# Altium PCB BMS_PCB.PcbDoc
Units mm, origin at the board's own origin, x right, y up, seen from the top; angles counter-clockwise.
Board outline 159.77 x 122.43 mm, 4 copper layers (Top Layer, HV_GND, LV_GND, Bottom Layer), stack 1.762 mm thick; 109 components, 72 nets, 406 pads, 0 vias.
Unrouted connection lines stored in the file: 182.
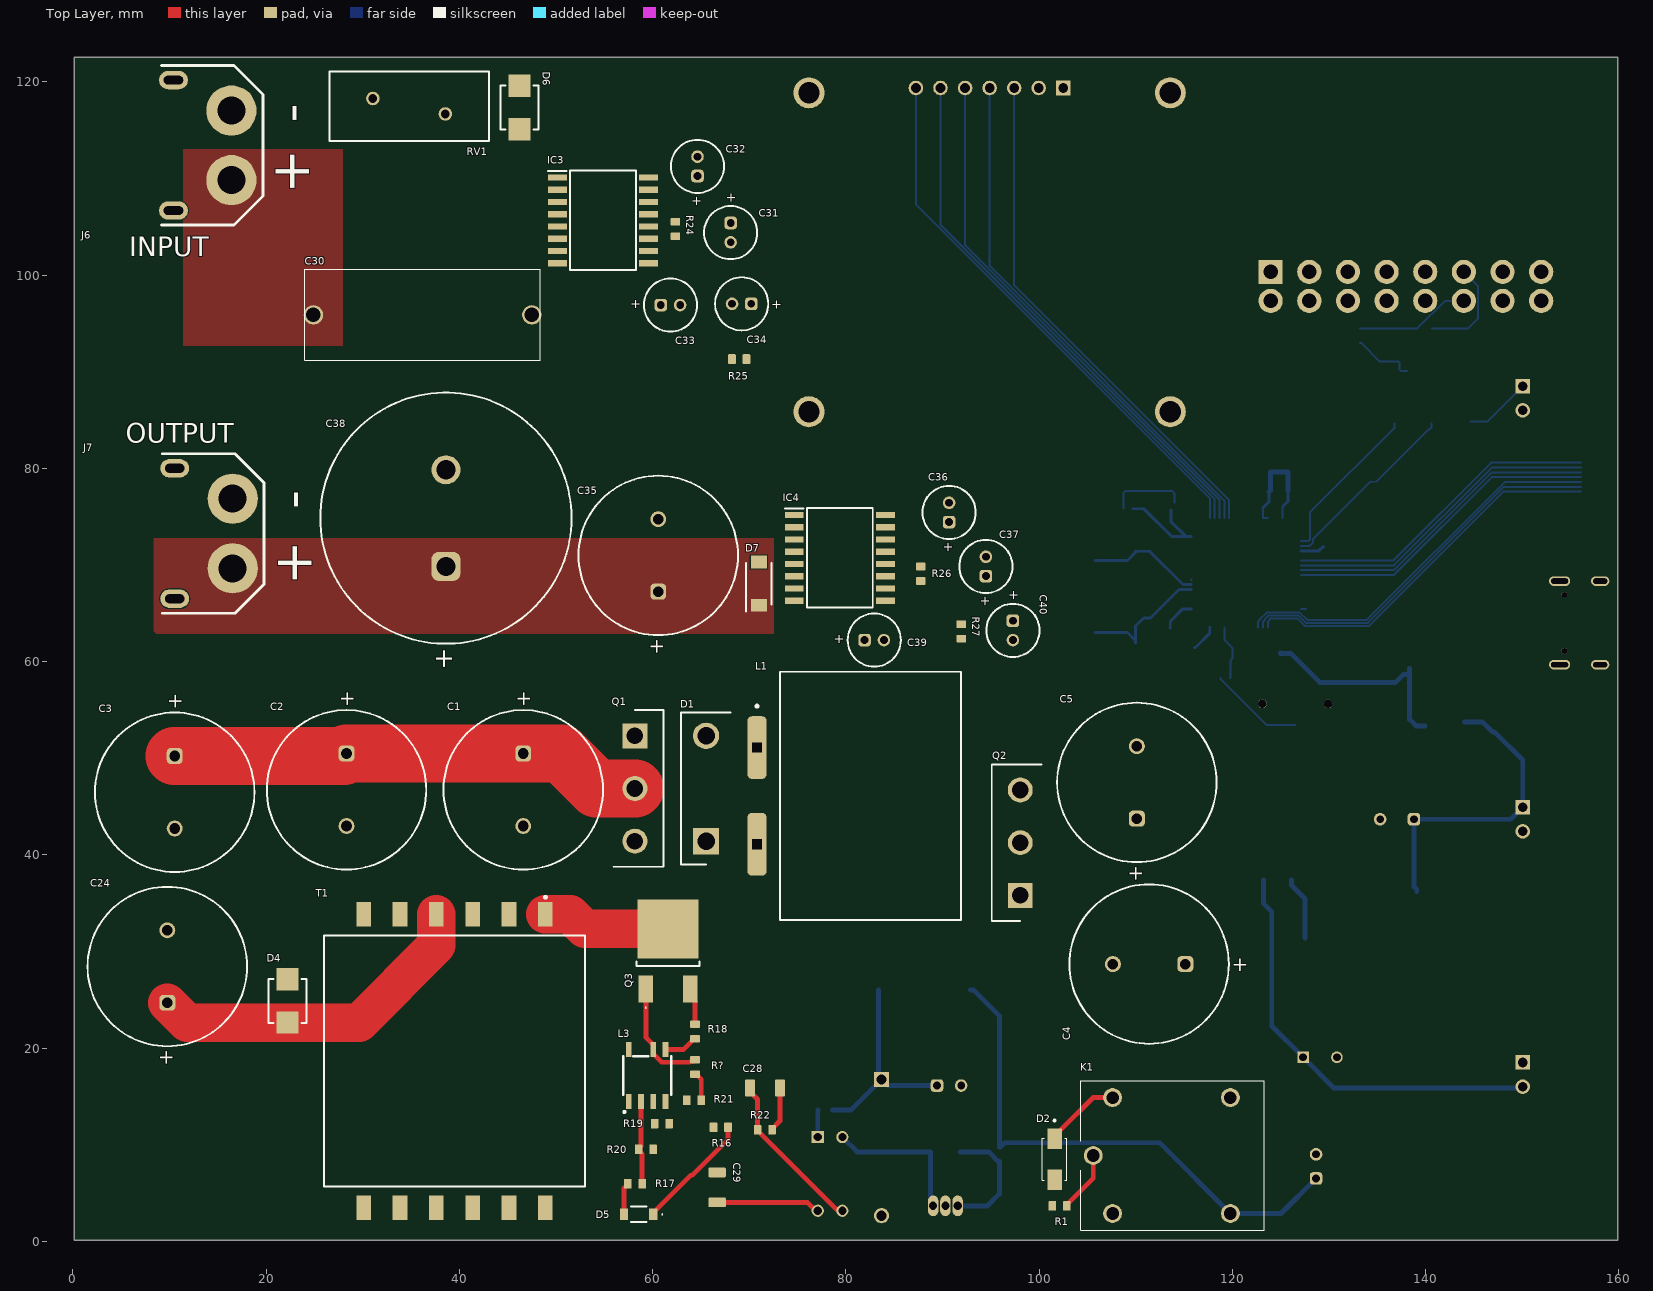
[diagram p0: Top Layer view]
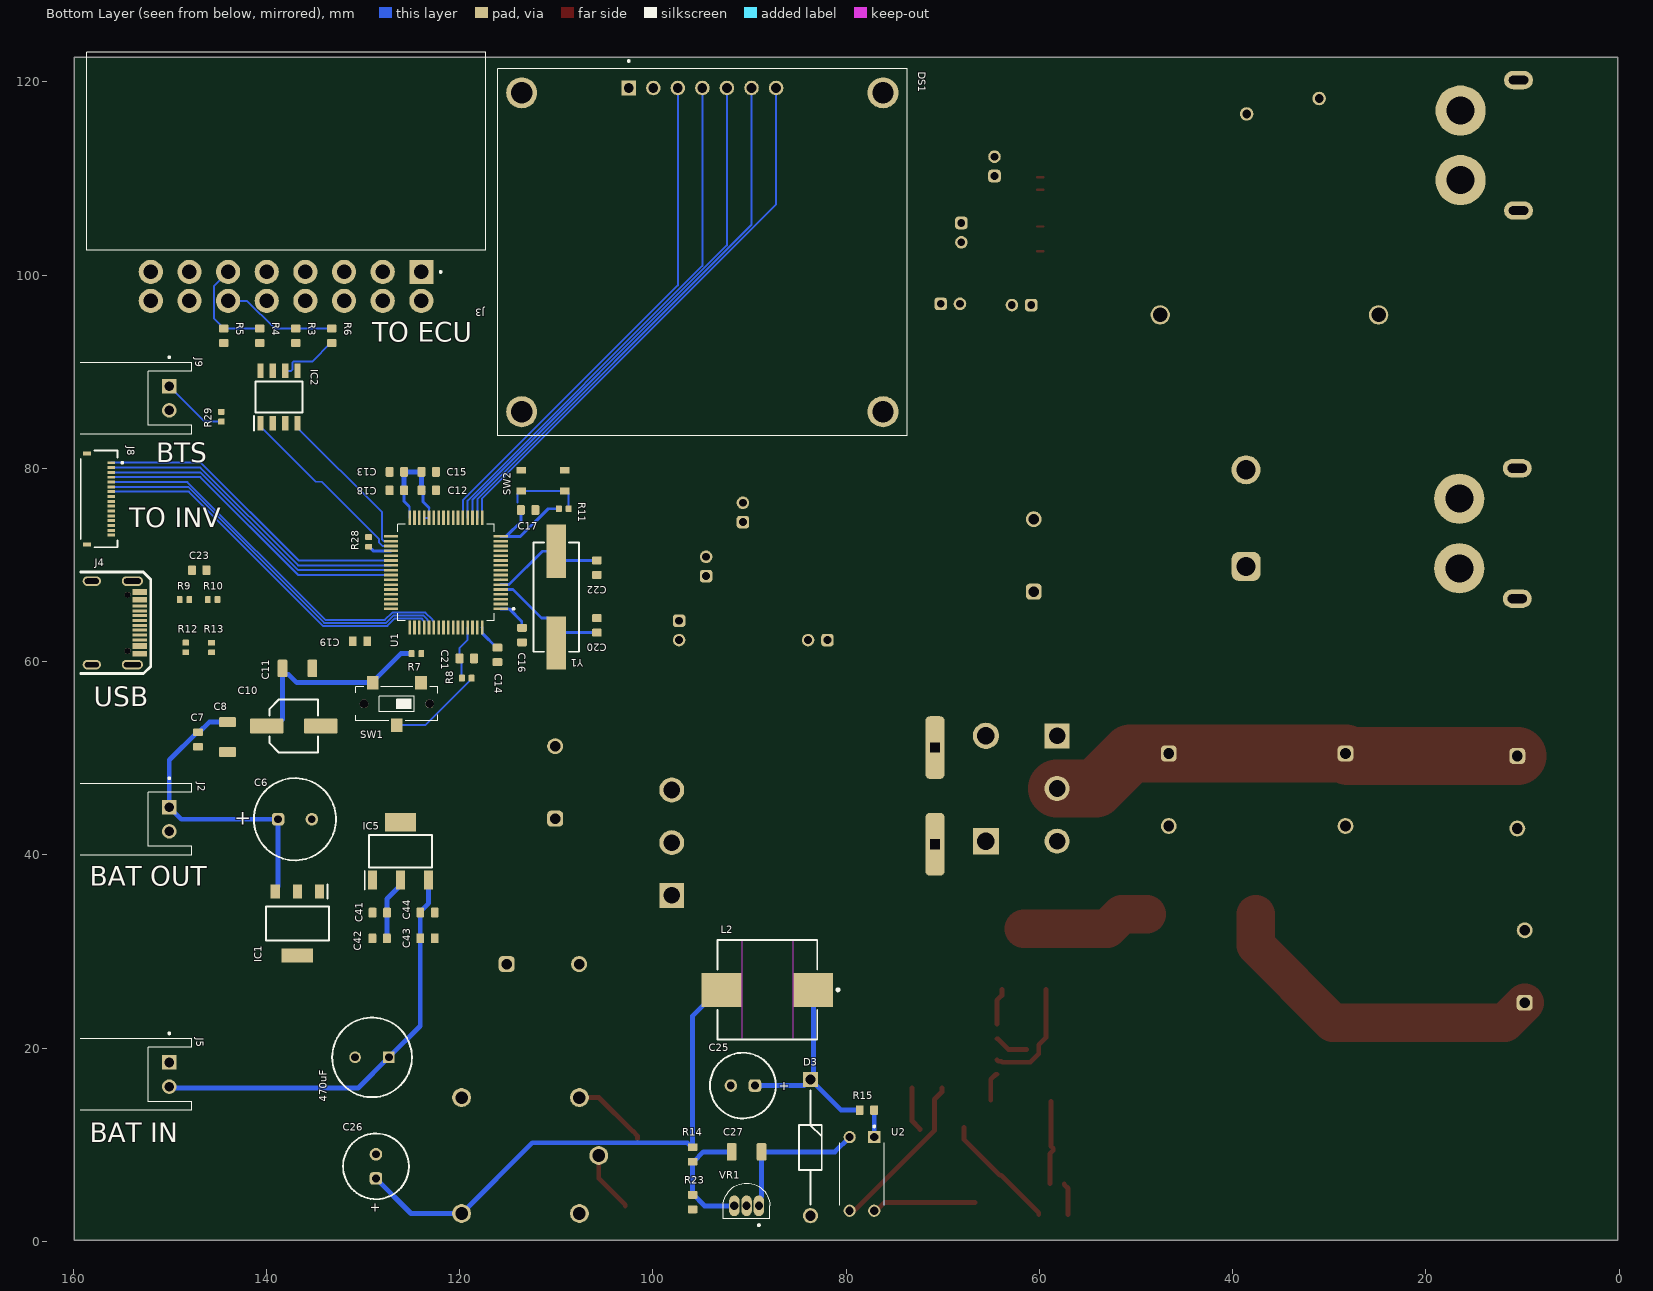
[diagram p1: Bottom Layer view, seen from below]
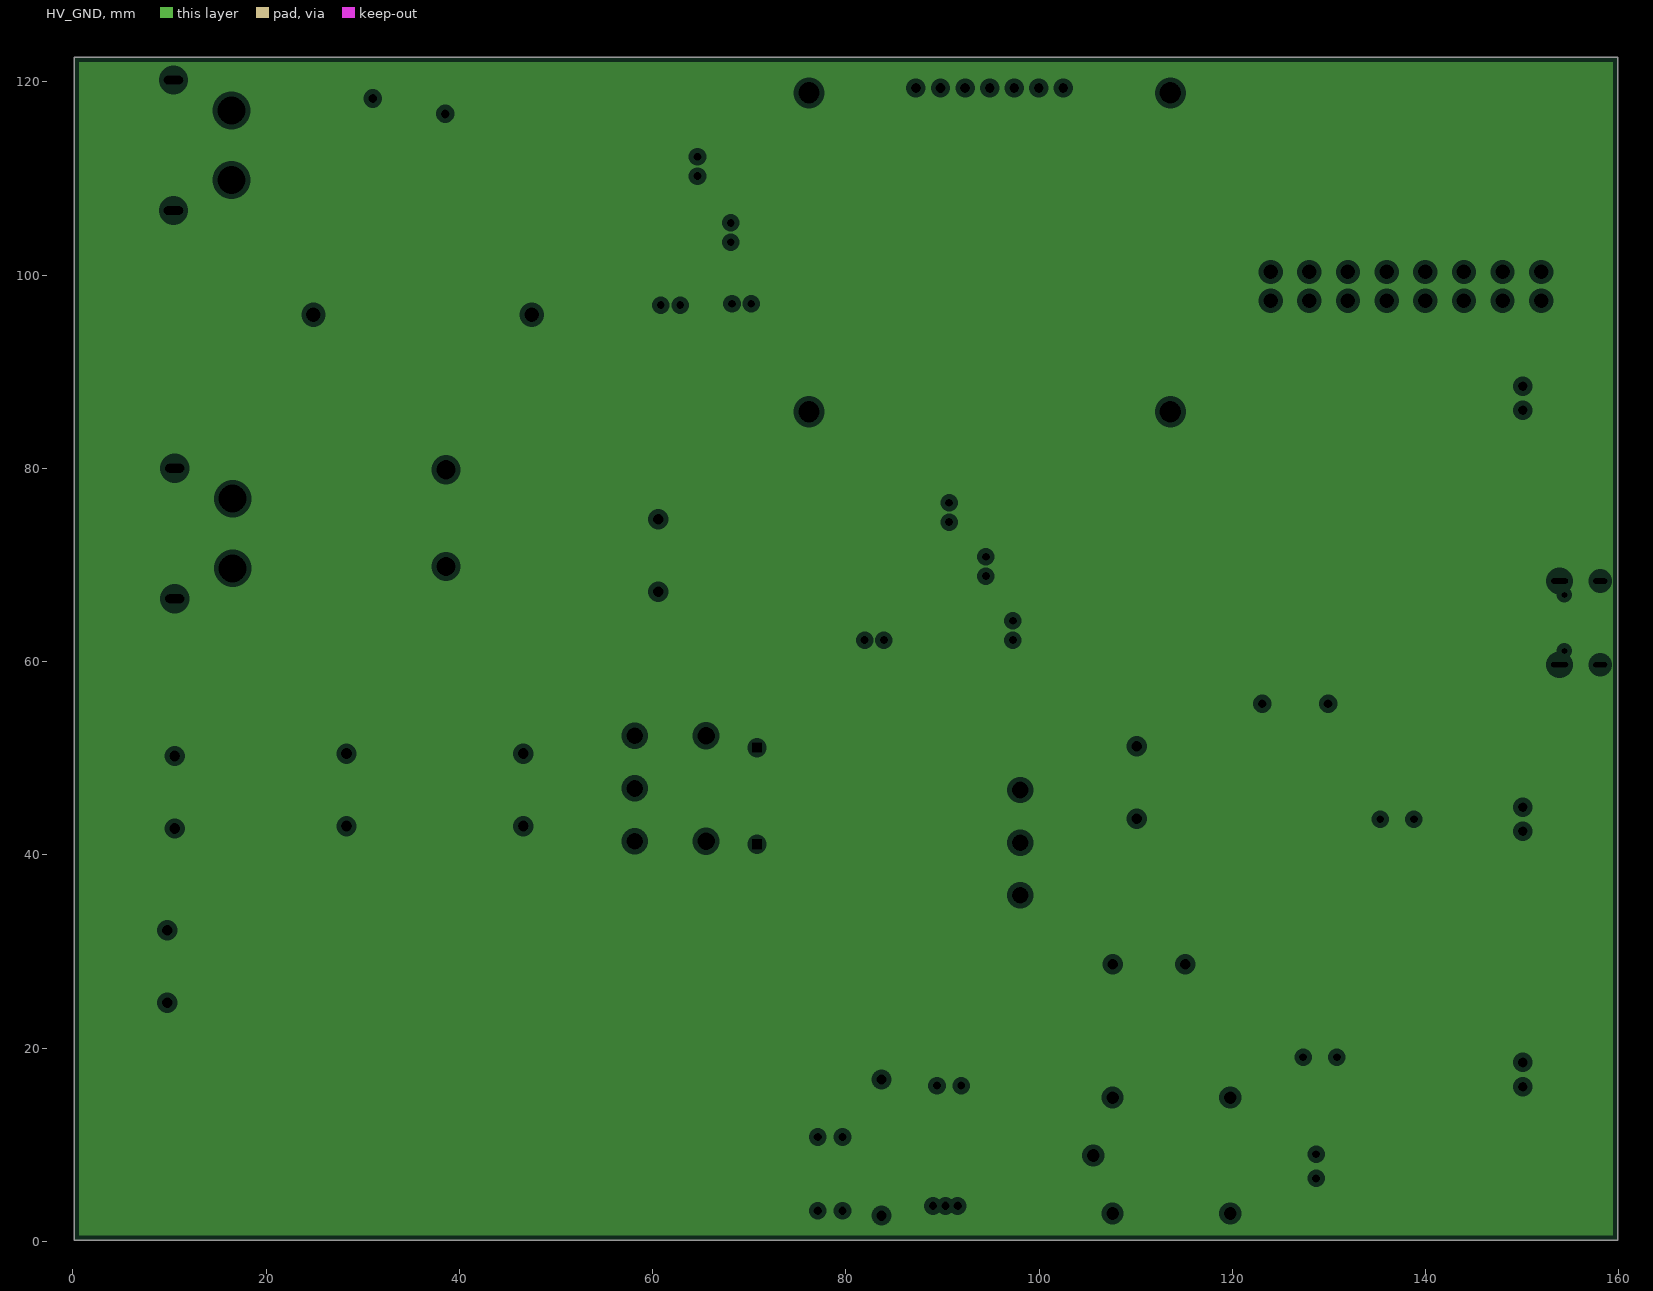
[diagram p2: HV_GND, clearances drawn from the general rule]
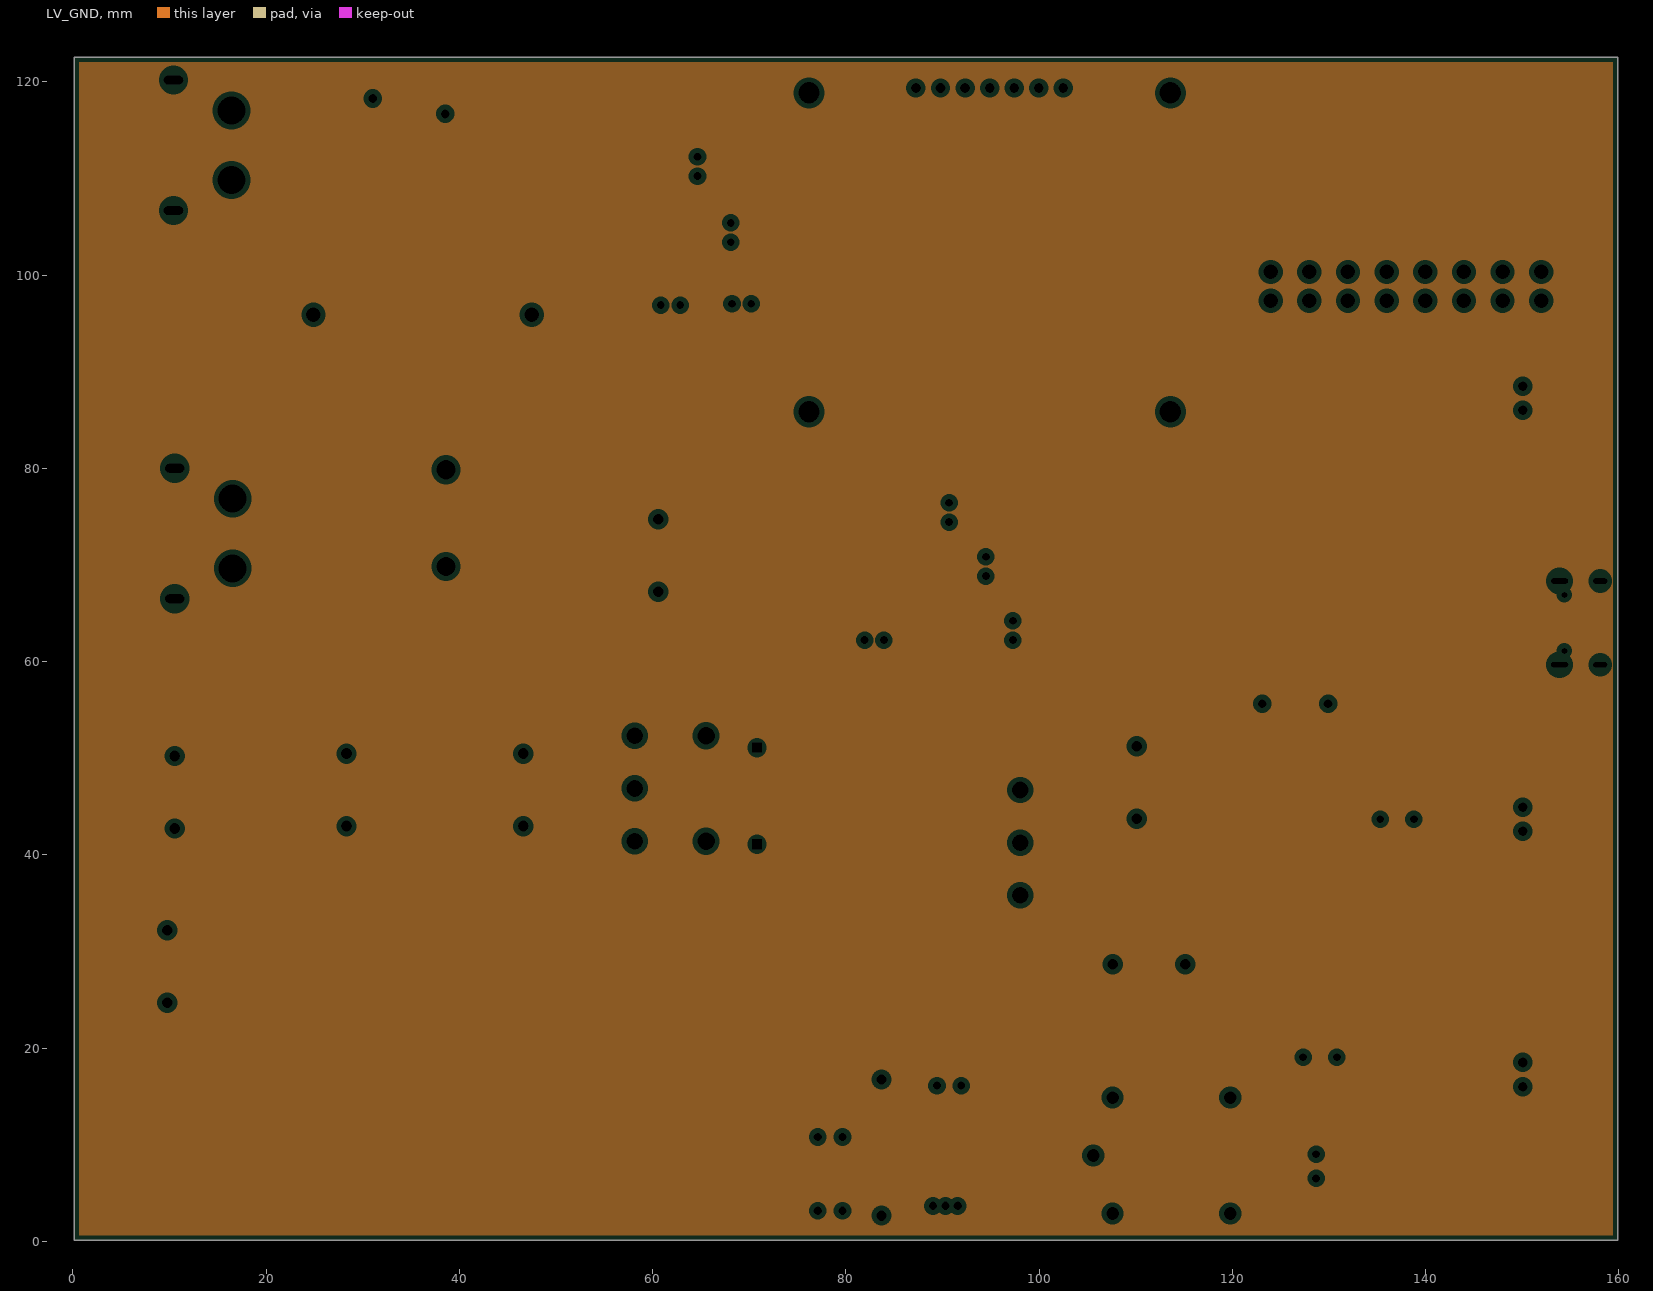
[diagram p3: LV_GND, clearances drawn from the general rule]

## Layer stack, top to bottom
Top Solder: solder mask 0.0102, Solder Resist, Dk 3.5
Top Layer: signal copper 0.105
Dielectric 2: prepreg 0.0711, PP-006, Dk 4.29
HV_GND: plane copper 0.105
Dielectric 1: dielectric 1.2, FR-4, Dk 4.8
LV_GND: plane copper 0.105
Dielectric 3: prepreg 0.0711, PP-006, Dk 4.29
Bottom Layer: signal copper 0.105
Bottom Solder: solder mask 0.0102, Solder Resist, Dk 3.5

## Board outline
0.127,0.127 0.127,122.555 159.893,122.555 159.893,0.127

## Design rules (kind name [scope] priority, off if disabled: settings)
Clearance [All] p1: gap=0.1 ignorepadtopadclearanceinfootprint=FALSE
ComponentClearance [All] p1: gap=0 collisioncheckmode=3 verticalgap=0 showdistances=FALSE
DiffPairsRouting [All] p1: maxlimit=0.254 minlimit=0.254 mostfreqgap=0.254 toplayer_minwidth=0.381 toplayer_maxwidth=0.381 toplayer_prefwidth=0.381 bottomlayer_minwidth=0.381 bottomlayer_maxwidth=0.381 bottomlayer_prefwidth=0.381 maxuncoupledlength=12.7
Height [All] p1: minheight=0 maxheight=50 prefheight=30
HoleSize [All] p1: absolutevalues=TRUE maxlimit=10 minlimit=0.025 maxpercent=80.000 minpercent=20.000
PlaneClearance [All] p1: clearance=0.508
PlaneConnect [All] p1: planeconnectstyle=Relief reliefexpansion=5 reliefentries=4 reliefconductorwidth=5 reliefairgap=0.2
PolygonConnect [All] p1: connectstyle=Relief reliefconductorwidth=5 reliefentries=4 polygonreliefangle="90 Angle" airgapwidth=0.2
RoutingVias [All] p1: holewidth=0.711 width=1.27 viastyle="Through Hole" minholewidth=0.711 minwidth=1.27 maxholewidth=0.711 maxwidth=1.27
SilkToSilkClearance [All] p1: silktosilkclearance=0.1
SolderMaskExpansion [All] p1: expansion=0.102 istentingtop=FALSE
UnRoutedNet [All] p1: checkbadconnections=TRUE
Width [All] p1: maxlimit=15 minlimit=0.2 preferedwidth=10 minimp=50.000000 maximp=50.000000 favimp=50.000000
22 further rules are at their usual default settings.

## Classes and differential pairs
component class "Switch mode power supply": 470uF C24 C25 C26 C27 C28 C29 D3 D4 D5 J5 L2 L3 Q3 R14 R15 R16 R17 R18 R19 R20 R21 R22 R23 R? T1 U2 VR1
component class "HV power supply": C1 C2 C3 C4 C5 C6 C7 C8 C10 C11 D1 D2 IC1 J2 J8 K1 L1 Q1 Q2 R1
component class "Current sensors": C30 C31 C32 C33 C34 C35 C36 C37 C38 C39 C40 C41 C42 C43 C44 D6 D7 IC3 IC4 IC5 J6 J7 R24 R25 R26 R27 RV1
component class CPU: C12 C13 C14 C15 C16 C17 C18 C19 C20 C21 C22 C23 DS1 IC2 J3 J4 J9 R3 R4 R5 R6 R7 R8 R9 R10 R11 R12 R13 R28 R29 SW1 SW2 U1 Y1
differential pair USB: +USB_P -USB_N

## Components (designator, comment, footprint, x,y, rotation, side; value= is the part's Value field where it differs from the comment)
470uF "UVR1C471MPD" CAPPRD350W60D825H1300 127.31,19.05 r0 bottom
C1 "100µF" WCAP-AT1H_D16H35.5 46.609,46.736 r90 top
C2 "100µF" WCAP-AT1H_D16H35.5 28.321,46.736 r90 top
C3 "100µF" WCAP-AT1H_D16H35.5 10.541,46.482 r90 top
C4 "100µF" WCAP-AT1H_D16H35.5 111.379,28.702 r0 top
C5 "100µF" WCAP-AT1H_D16H35.5 110.109,47.498 r270 top
C6 "680uF" WCAP-ATG8_D8H16 137.033,43.688 r0 bottom
C7 "0.1uF" CAP_0603 147.066,51.943 r270 bottom
C8 "10uF" CAP_1206 144.018,52.197 r270 bottom
C10 "220uF" CAP-EL-NP-5MM 137.16,53.34 r180 bottom
C11 "20uF" CAP_1206 136.779,59.309 r180 bottom
C12 "1uF" CAP_0603 123.19,77.724 r180 bottom
C13 "10nF" CAP_0603 126.492,79.629 r0 bottom
C14 "10nF" CAP_0603 116.078,60.706 r270 bottom
C15 "10nF" CAP_0603 123.19,79.629 r180 bottom
C16 "10nF" CAP_0603 113.538,62.738 r270 bottom
C17 "10nF" CAP_0603 112.903,75.692 r180 bottom
C18 "10nF" CAP_0603 126.492,77.724 r0 bottom
C19 "10nF" CAP_0603 130.302,62.103 r0 bottom
C20 "26pF" CAP_0603 105.791,63.754 r90 bottom
C21 "1uF" CAP_0603 119.253,60.325 r180 bottom
C22 "26pF" CAP_0603 105.791,69.723 r270 bottom
C23 "100 nF" CAP_0603 146.939,69.469 r180 bottom
C24 "100µF" WCAP-AT1H_D16H35.5 9.779,28.448 r270 top
C25 "220uF" WCAP-ATG8_D6.3H11 90.678,16.129 r180 bottom
C26 "220uF" WCAP-ATG8_D6.3H11 128.651,7.767 r270 bottom
C27 "100nF" CAP_1206 90.297,9.271 r180 bottom
C28 "0.047uF" CAP_1206 71.628,15.875 r0 top
C29 "4.7uF" CAP_1206 66.675,5.588 r270 top
C30 "fuse holder" 696108003002 36.195,95.885 r0 top
C31 "100uF" WCAP-ATG8_D5H11 68.072,104.394 r90 top
C32 "100uF" WCAP-ATG8_D5H11 64.643,111.252 r270 top
C33 "100uF" WCAP-ATG8_D5H11 61.849,96.901 r180 top
C34 "100uF" WCAP-ATG8_D5H11 69.215,97.028 r0 top
C35 "100µF" WCAP-AT1H_D16H35.5 60.579,70.993 r270 top
C36 "100uF" WCAP-ATG8_D5H11 90.678,75.438 r270 top
C37 "100uF" WCAP-ATG8_D5H11 94.488,69.85 r270 top
C38 "220µF" WCAP-AIE8_D25H40 38.608,74.85 r270 top
C39 "100uF" WCAP-ATG8_D5H11 82.931,62.23 r180 top
C40 "100uF" WCAP-ATG8_D5H11 97.282,63.23 r90 top
C41 "10uF" CAP_0603 128.258,34.036 r180 bottom
C42 "100nF" CAP_0603 128.27,31.369 r180 bottom
C43 "10uF" CAP_0603 123.317,31.369 r180 bottom
C44 "100nF" CAP_0603 123.317,34.036 r180 bottom
D1 "STTH60RQ06WY" TO1090P515X1560X2445-2P 65.532,41.424 r90 top
D2 "SS14" DIOM4325X250N 101.6,8.509 r270 top
D3 "BA159" DIOAD1405W86L465D235 83.693,16.764 r270 bottom
D4 "600W, 5VDC" WE-TVSP_DO-214AA_Bidirectional 22.225,24.892 r90 top
D5 "RF071M2S" RF071M2S 58.547,2.794 r270 top
D6 "600W, 5VDC" WE-TVSP_DO-214AA_Bidirectional 46.228,117.348 r90 top
D7 "AES2HF-HF" SODFL5226X110N 70.993,68.072 r90 top
DS1 "AOM12864A0-1.54WW-ANO" LCD_AOM12864A0-1.54WW-ANO 94.869,102.362 r180 bottom
IC1 "AMS1117-3.3" SOT229P700X180-4N 136.779,32.893 r270 bottom
IC2 "TJA1050T_CM,118" SOIC127P600X175-8N 138.684,87.376 r90 bottom
IC3 "ACS37002KMABTR-050B5-00" SOIC127P1030X265-16N 54.864,105.664 r0 top
IC4 "ACS37002KMABTR-050B5-00" SOIC127P1030X265-16N 79.375,70.739 r0 top
IC5 "AMS1117-5.0" SOT290P700X180-4N 126.111,40.386 r90 bottom
J2 "12V battery" JST_S2B-XH-A(LF)(SN) 155.739,43.688 r270 bottom
J3 "C-OBD-II-16M" COMTECH_C-OBD-II-16M 123.954,100.33 r0 bottom
J4 "TYPE-C-31-M-12" TYPE-C-31-M-12 155.956,64.008 r270 bottom
J5 "12V battery" JST_S2B-XH-A(LF)(SN) 155.739,17.272 r270 bottom
J6 "400VDC_PV" XT60PW-F 13.414,113.43 r90 top
J7 "400VDC_PV" XT60PW-F 13.541,73.26 r90 top
J8 "FFC2B28-16-G" GCT_FFC2B28-16-G 157.302,76.835 r270 bottom
J9 "S2B-XH-A(LF)(SN)" JST_S2B-XH-A(LF)(SN) 155.739,87.249 r270 bottom
K1 "PR13-12V-450-1C" RELAY_PR13-12V-450-1C 113.792,8.89 r0 top
L1 "1µH" WE-HCFT_2504_7443762504010 82.55,46.101 r270 top
L2 "1 μH" WE-LHMI_1040 88.138,26.035 r0 bottom
L3 "UCC28740DR" D(R-PDSO-G7) 59.436,17.178 r0 top
Q1 "SCT3030ALGC11" TO545P515X1600X2535-3P 58.166,52.324 r270 top
Q2 "SCT3030ALGC11" TO545P515X1600X2535-3P 98.044,35.814 r90 top
Q3 "STD13NM60ND" STD13NM60ND 61.595,30.353 r0 top
R1 "10K" RES_0603 102.108,3.683 r0 top
R3 "60" RES_0603 136.948,93.726 r90 bottom
R4 "60" RES_0603 140.674,93.726 r90 bottom
R5 "0" RES_0603 144.399,93.726 r270 bottom
R6 "0" RES_0603 133.223,93.726 r270 bottom
R7 "4.7K" RES_0402 124.46,60.833 r0 bottom
R8 "10K" RES_0402 119.253,58.293 r0 bottom
R9 "20K" RES_0402 148.463,66.421 r180 bottom
R10 "10K" RES_0402 145.55,66.421 r180 bottom
R11 "10K" RES_0402 109.22,75.819 r0 bottom
R12 "5K1" RES_0402 148.336,61.468 r270 bottom
R13 "5K1" RES_0402 145.669,61.46 r270 bottom
R14 "7.5K" RES_0603 95.885,9.005 r90 bottom
R15 "820" RES_0603 77.851,13.589 r0 bottom
R16 "154" RES_0603 67.056,11.811 r0 top
R17 "226K" RES_0603 58.166,5.969 r180 top
R18 "1.27K" RES_0603 64.389,21.717 r90 top
R19 "22K" RES_0603 60.96,12.192 r180 top
R20 "27.4K" RES_0603 59.309,9.525 r180 top
R21 "0.82" RES_0603 64.274,14.605 r0 top
R22 "100K" RES_0603 71.616,11.557 r0 top
R23 "2K" RES_0603 95.885,4.064 r90 bottom
R24 "R0603" RES_0603 62.357,104.775 r270 top
R25 "R0603" RES_0603 68.961,91.313 r180 top
R26 "R0603" RES_0603 87.757,69.088 r270 top
R27 "R0603" RES_0603 91.948,63.119 r270 top
R28 "4.7K" RES_0402 129.413,72.39 r270 bottom
R29 "10K" RES_0402 144.653,85.344 r90 bottom
R? "10k" RES_0603 64.389,18.046 r270 top (schematic designator R30)
RV1 "320 VAC, 418 VDC" D16.5W7.2H20.5P1.6 34.798,117.475 r180 top
SW1 "CL-SB-12B-01T" CL-SB-12B-01T 126.492,55.626 r0 bottom
SW2 "Tactile Switch" PTS815 111.379,78.74 r0 bottom
T1 "100-400Vin, Uo1 = 15V/3A" WE-FB_EFD25 39.497,18.669 r270 top
U1 "STM32G474RET6" QFP50P1200X1200X160-64N 121.412,69.215 r0 bottom
U2 "PC817X3NSZ1B" DIP762W50P254L495H455Q4 78.359,6.985 r270 bottom
VR1 "TL431ILP" VREG_TL431ILP 90.297,3.683 r180 bottom
Y1 "20Mhz" WE-XTAL_HC49/4HSMX 109.982,66.675 r90 bottom

## Footprints (in the part's own frame and the unit in brackets; to place one, negate y for a bottom-side part, rotate by r counter-clockwise, add the part's x,y. Pads: shape width x height; smd on the part's side, far side on the other; paste and mask are expansions set on the pad)
696108003002 [mm] "FUSEHOLDER BLOCKS - PCB - CLIP COVER - THT - WR-FSH"
  round 2 hole 1.5: 1(-11.3,0) 2(11.3,0)
  silkscreen extent -12.2,-4.7 12.2,4.7, body extent -12.2,-4.7 12.2,4.7, height 23.72
CAP-EL-NP-5MM [mm]
  rrect25% 3.5x1.6 smd: 1(-2.8,0) 2(2.8,0)
  silkscreen extent -2.5,-2.75 2.5,2.75, body extent -2.65,-2.75 2.65,2.75, height 6.1
CAP_0603 [mm]
  rrect25% 0.8x1 smd: 1(-0.75,0) 2(0.75,0)
  body extent -0.8,-0.4 0.8,0.4, height 0.51
CAP_1206 [mm]
  rrect25% 1x1.8 smd: 1(-1.55,0) 2(1.55,0)
  body extent -1.6,-0.8 1.6,0.8, height 0.94
CAPPRD350W60D825H1300 [mm]
  rect 1.2x1.2 hole 0.8: 1(0,0)
  round 1.2 hole 0.8: 2(3.5,0)
  silkscreen extent -2.38,-4.12 5.87,4.12, body extent -2.49,-4.25 6,4.25, height 13
CL-SB-12B-01T [mm]
  rect 1.2x1.4 smd: 1(-2.5,-2.2) 3(2.5,-2.2) C(0,2.2)
  round 0.9 hole 0.9 unplated: ""(-3.4,0) ""(3.4,0)
  silkscreen extent -4.25,-1.8 4.25,1.75, body extent -4.25,-2.5 4.25,2.5, height 5.5
COMTECH_C-OBD-II-16M [mm]
  rect 2.5x2.5 / inner round 2.5 / far side rect 2.5x2.5 hole 1.5: 1(0,0)
  round 2.5 hole 1.5: 2(4,0) 3(8,0) 4(12,0) 5(16,0) 6(20,0) 7(24,0) 8(28,0) 9(0,3) 10(4,3) 11(8,3) 12(12,3) 13(16,3) 14(20,3) 15(24,3) 16(28,3)
  silkscreen extent -6.65,-22.75 34.65,0.1, body extent -6.65,-22.75 34.65,3.4, height 16.1
D16.5W7.2H20.5P1.6 [mm] "Disk Varistor, Diameter 16.5mm, Width 7.2mm"
  round 1.4 hole 0.9: 1(-3.75,0.8) 2(3.75,-0.8)
  silkscreen extent -8.25,-3.6 8.25,3.6, body extent -7.5,-2.4 7.5,2.4, height 17.7
D(R-PDSO-G7) [mm]
  rect 0.6x1.55 smd: 1(-1.905,-2.7) 2(-0.635,-2.7) 3(0.635,-2.7) 4(1.905,-2.7) 5(1.905,2.7) 6(0.635,2.7) 7(-1.905,2.7)
  silkscreen extent -2.5,-3.86 2.5,2, body extent -2.45,-3.08 2.45,2.94, height 1.63
DIOAD1405W86L465D235 [mm]
  rect 1.575x1.575 hole 1.05: 1(0,0)
  round 1.575 hole 1.05: 2(14.1,0)
  silkscreen extent 1.14,-1.17 12.96,1.17, body extent -0.43,-1.34 14.48,1.34, height 2.7
DIOM4325X250N [mm]
  rect 2.12x1.5 smd: A(2.115,0) C(-2.115,0)
  silkscreen extent -4.1,-1.28 2.16,1.28, body extent -2.57,-1.28 2.57,1.28, height 2.5
DIP762W50P254L495H455Q4 [mm]
  rect 1.26x1.26 / inner round 1.26 / far side rect 1.26x1.26 hole 0.84: 1(-3.81,1.27)
  round 1.26 hole 0.84: 2(-3.81,-1.27) 3(3.81,-1.27) 4(3.81,1.27)
  silkscreen extent -5.01,-2.3 3.25,2.3, body extent -3.94,-2.3 3.94,2.3, height 4.55
GCT_FFC2B28-16-G [mm]
  rect 0.3x0.8 smd: 1(-3.75,1.25) 2(-3.25,1.25) 3(-2.75,1.25) 4(-2.25,1.25) 5(-1.75,1.25) 6(-1.25,1.25) 7(-0.75,1.25) 8(-0.25,1.25) 9(0.25,1.25) 10(0.75,1.25) 11(1.25,1.25) 12(1.75,1.25) 13(2.25,1.25) 14(2.75,1.25) 15(3.25,1.25) 16(3.75,1.25)
  rect 0.4x0.8 smd: S1(-4.7,-1.25) S2(4.7,-1.25)
  silkscreen extent -5,-1.9 5,2.5, body extent -5,-1.9 5,1.9, height 1.1
JST_S2B-XH-A(LF)(SN) [mm]
  rect 1.508x1.508 / inner round 1.508 / far side rect 1.508x1.508 hole 1: 1(-1.25,5.7)
  round 1.508 hole 1: 2(1.25,5.7)
  silkscreen extent -4.35,-3.5 3.7,8, body extent -3.7,-3.5 3.7,8, height 6.1
LCD_AOM12864A0-1.54WW-ANO [mm]
  rect 1.508x1.508 / inner round 1.508 / far side rect 1.508x1.508 hole 1: 1(-7.62,17)
  round 1.508 hole 1: 2(-5.08,17) 3(-2.54,17) 4(0,17) 5(2.54,17) 6(5.08,17) 7(7.62,17)
  round 3.216 hole 2.2: P1(-18.7,16.5) P2(18.7,16.5) P3(-18.7,-16.5) P4(18.7,-16.5)
  silkscreen extent -21.2,-19 21.2,19.89, body extent -21.2,-19 21.2,19, height 5.5
PTS815 [mm]
  rrect10% 1x0.7 smd mask+0: 1(-2.25,1.075) 1(2.25,1.075) 2(-2.25,-1.075) 2(2.25,-1.075)
  body extent -2.25,-1.6 2.25,1.6, height 2.5
QFP50P1200X1200X160-64N [mm]
  rect 1.47x0.28 smd: 1(-5.67,3.75) 2(-5.67,3.25) 3(-5.67,2.75) 4(-5.67,2.25) 5(-5.67,1.75) 6(-5.67,1.25) 7(-5.67,0.75) 8(-5.67,0.25) 9(-5.67,-0.25) 10(-5.67,-0.75) 11(-5.67,-1.25) 12(-5.67,-1.75) 13(-5.67,-2.25) 14(-5.67,-2.75) 15(-5.67,-3.25) 16(-5.67,-3.75) 33(5.67,-3.75) 34(5.67,-3.25) 35(5.67,-2.75) 36(5.67,-2.25) 37(5.67,-1.75) 38(5.67,-1.25) 39(5.67,-0.75) 40(5.67,-0.25) 41(5.67,0.25) 42(5.67,0.75) 43(5.67,1.25) 44(5.67,1.75) 45(5.67,2.25) 46(5.67,2.75) 47(5.67,3.25) 48(5.67,3.75)
  rect 0.28x1.47 smd: 17(-3.75,-5.67) 18(-3.25,-5.67) 19(-2.75,-5.67) 20(-2.25,-5.67) 21(-1.75,-5.67) 22(-1.25,-5.67) 23(-0.75,-5.67) 24(-0.25,-5.67) 25(0.25,-5.67) 26(0.75,-5.67) 27(1.25,-5.67) 28(1.75,-5.67) 29(2.25,-5.67) 30(2.75,-5.67) 31(3.25,-5.67) 32(3.75,-5.67) 49(3.75,5.67) 50(3.25,5.67) 51(2.75,5.67) 52(2.25,5.67) 53(1.75,5.67) 54(1.25,5.67) 55(0.75,5.67) 56(0.25,5.67) 57(-0.25,5.67) 58(-0.75,5.67) 59(-1.25,5.67) 60(-1.75,5.67) 61(-2.25,5.67) 62(-2.75,5.67) 63(-3.25,5.67) 64(-3.75,5.67)
  silkscreen extent -7.1,-5 5,5, body extent -6,-6 6,6, height 1.6
RELAY_PR13-12V-450-1C [mm]
  round 1.95 hole 1.3: A1(-6.2,6) A2(-6.2,-6) COM(-8.2,0) NC(6,6) NO(6,-6)
  silkscreen extent -9.5,-7.75 9.5,7.75, body extent -9.5,-7.75 9.5,7.75, height 15.5
RES_0402 [mm]
  rrect25% 0.6x0.7 smd: 1(-0.5,0) 2(0.5,0)
  body extent -0.5,-0.25 0.5,0.25, height 0.3
RES_0603 [mm]
  rrect25% 0.8x1 smd: 1(-0.75,0) 2(0.75,0)
  body extent -0.8,-0.43 0.8,0.43, height 0.52
RF071M2S [mm]
  rect 1.2x0.85 smd: 1(0,1.525) 2(0,-1.525)
  silkscreen extent -0.8,-0.8 0.8,2.5, body extent -0.8,-1.87 0.8,1.87, height 1
SODFL5226X110N [mm]
  rect 1.32x1.64 smd: 1(-2.25,0) 2(2.25,0)
  silkscreen extent -2.91,-1.33 2.15,1.33, body extent -2.6,-1.33 2.6,1.33, height 1.1
SOIC127P600X175-8N [mm]
  rect 1.525x0.65 smd: 1(-2.712,1.905) 2(-2.712,0.635) 3(-2.712,-0.635) 4(-2.712,-1.905) 5(2.712,-1.905) 6(2.712,-0.635) 7(2.712,0.635) 8(2.712,1.905)
  silkscreen extent -3.47,-2.45 1.6,2.58, body extent -3,-2.45 3,2.45, height 1.75
SOIC127P1030X265-16N [mm]
  rect 1.95x0.65 smd: 1(-4.725,4.445) 2(-4.725,3.175) 3(-4.725,1.905) 4(-4.725,0.635) 5(-4.725,-0.635) 6(-4.725,-1.905) 7(-4.725,-3.175) 8(-4.725,-4.445) 9(4.725,-4.445) 10(4.725,-3.175) 11(4.725,-1.905) 12(4.725,-0.635) 13(4.725,0.635) 14(4.725,1.905) 15(4.725,3.175) 16(4.725,4.445)
  silkscreen extent -5.7,-5.15 3.4,5.15, body extent -5.15,-5.15 5.15,5.15, height 2.65
SOT229P700X180-4N [mm]
  rect 1.45x0.95 smd: 1(-3.3,2.29) 2(-3.3,0) 3(-3.3,-2.29)
  rect 1.45x3.25 smd: 4(3.3,0)
  silkscreen extent -4.03,-3.25 1.75,3.25, body extent -3.35,-3.15 3.35,3.15, height 1.8
SOT290P700X180-4N [mm]
  rect 1.95x0.9 smd: 1(-3,2.9) 2(-3,0) 3(-3,-2.9)
  rect 1.95x3.2 smd: 4(3,0)
  silkscreen extent -3.98,-3.25 1.68,3.7, body extent -3.5,-3.25 3.5,3.25, height 1.8
STD13NM60ND [mm]
  rect 1.5x2.8 smd: 1(-2.286,-4.25) 3(2.286,-4.25)
  rect 6.3x6.1 smd: 2(0,2)
  silkscreen extent -3.25,-6.2 3.25,-1.4, body extent -3.27,-4.21 3.27,5.66, height 2.63
TO545P515X1600X2535-3P [mm]
  rect 2.58x2.58 hole 1.72: 1(0,0)
  round 2.58 hole 1.72: 2(5.45,0) 3(10.9,0)
  silkscreen extent -2.65,-2.2 13.55,2.95, body extent -2.55,-2.2 13.45,2.95, height 25
TO1090P515X1560X2445-2P [mm]
  rect 2.715x2.715 hole 1.81: 1(0,0)
  round 2.715 hole 1.81: 2(10.9,0)
  silkscreen extent -2.42,-2.55 13.33,2.6, body extent -2.35,-2.55 13.25,2.6, height 24.45
TYPE-C-31-M-12 [mm]
  rect 0.6x1.5 smd mask+0.07: A1B12(-3.2,2.85) B1A12(3.2,2.85)
  rect 0.6x1.5 smd mask+0.14: A4B9(-2.4,2.85) B4A9(2.4,2.85)
  rect 0.3x1.5 smd mask+0.14: A5(-1.25,2.85) A6(-0.25,2.85) A7(0.25,2.85) A8(1.25,2.85) B5(1.75,2.85) B6(0.75,2.85) B7(-0.75,2.85) B8(-1.75,2.85)
  round 0.6 hole 0.6 unplated mask+0.3: MH(-2.9,1.6) MH(2.9,1.6)
  oval 1x1.9 hole 0.55 slot 1.45 at 90 deg mask+0.05: SH(-4.325,-2.1) SH(4.325,-2.1)
  oval 1x2.2 hole 0.55 slot 1.75 at 90 deg mask+0.05: SH(-4.325,2.1) SH(4.325,2.1)
  silkscreen extent -5.25,-3.25 5.25,4, body extent -4.47,-4.65 4.47,3.25, height 3.32
VREG_TL431ILP [mm]
  oval 1.07x2.14 hole 0.85: 1(1.27,0) 2(0,0) 3(-1.27,0)
  silkscreen extent -2.41,-2.1 2.41,2.35, body extent -2.83,-1.33 2.83,2.35, height 9.34
WCAP-AIE8_D25H40 [mm] "Aluminium Electrolytic Snap-In Capacitors, 25x40mm"
  rrect50% 3x3 hole 2: 1(5,0)
  round 3 hole 2: 2(-5,0)
  silkscreen extent -13,-13 13,13, body extent -12.46,-12.5 12.5,12.5, height 41.09
WCAP-AT1H_D16H35.5 [mm] "Aluminium Electrolytic Radial THD Capacitors, 16x35.5mm"
  rrect50% 1.65x1.65 hole 1.1: 1(3.75,0)
  round 1.65 hole 1.1: 2(-3.75,0)
  silkscreen extent -8.25,-8.25 8.25,8.25, body extent -7.99,-8 8,8, height 35.54
WCAP-ATG8_D5H11 [mm] "Aluminum Electrolytic Capacitors, 5x11mm"
  rrect50% 1.3x1.3 hole 0.8: 1(1,0)
  round 1.3 hole 0.8: 2(-1,0)
  silkscreen extent -2.75,-2.75 2.75,2.75, body extent -2.49,-2.5 2.5,2.5, height 11.31
WCAP-ATG8_D6.3H11 [mm] "Aluminum Electrolytic Capacitors, 6.3x11mm"
  rrect50% 1.3x1.3 hole 0.8: 1(1.25,0)
  round 1.3 hole 0.8: 2(-1.25,0)
  silkscreen extent -3.4,-3.4 3.4,3.4, body extent -3.14,-3.15 3.14,3.14, height 11.31
WCAP-ATG8_D8H16 [mm] "Aluminum Electrolytic Capacitors, 8x16mm"
  rrect50% 1.3x1.3 hole 0.8: 1(1.75,0)
  round 1.3 hole 0.8: 2(-1.75,0)
  silkscreen extent -4.25,-4.25 4.25,4.25, body extent -3.99,-4 3.99,3.99, height 16.31
WE-FB_EFD25 [mm] "Flyback Transformer, size EFD25"
  rect 2.5x1.52 smd: 1(-15.19,9.4) 2(-15.19,5.64) 3(-15.19,1.88) 4(-15.19,-1.88) 5(-15.19,-5.64) 6(-15.19,-9.4) 7(15.19,-9.4) 8(15.19,-5.64) 9(15.19,-1.88) 10(15.19,1.88) 11(15.19,5.64) 12(15.19,9.4)
  silkscreen extent -17.07,-13.52 13,13.51, body extent -15.75,-12.5 15.75,12.5, height 13.05
WE-HCFT_2504_7443762504010 [mm] "Flat THT High Current Inductor, body 25.2x18.2mm"
  rrect50% 6.5x2 hole 1 square: 1(-5,-11.75) 2(5,-11.75)
  silkscreen extent -12.85,-11.87 12.85,9.35, body extent -12.6,-12 12.6,10, height 4.15
WE-LHMI_1040 [mm] "SMT Power Inductor, 2-Leads, body 10x10mm"
  rect 4.1x3.5 smd: 1(-4.75,0) 2(4.75,0)
  Top Layer keep-out region: -2.6,5.15 2.6,5.15 2.6,-5.15 -2.6,-5.15
  silkscreen extent -7.42,-5.15 5.15,5.15, body extent -5.5,-5 5.5,5, height 3.8
WE-TVSP_DO-214AA_Bidirectional [mm] "Power TVS Diode, 2-Leads. body 4.32x3.62mm"
  rect 2.3x2.3 smd: 1(-2.25,0) 2(2.25,0)
  silkscreen extent -2.28,-1.97 2.28,1.97, body extent -2.7,-1.81 2.7,1.81, height 2.38
WE-XTAL_HC49/4HSMX [mm] "Quartz Crystal, size HC49/4HSMX, body 11.4x4.9mm"
  rect 5.5x2 smd: 1(-4.75,0) 2(4.75,0)
  silkscreen extent -5.65,-2.35 5.65,2.35, body extent -6.7,-2.45 6.7,2.45, height 4.4
XT60PW-F [mm]
  round 5.2 hole 2.9: 1(-3.6,-3) 2(3.6,-3)
  oval 1.9x3 hole 0.9 slot 2 at 90 deg: MH(-6.75,3) MH(6.75,3)
  silkscreen extent -8.25,-6.25 8.25,4.25, body extent -7.75,-4.85 7.75,12.35, height 8.41

## Part data
470uF: "Capacitor Polarised", Manufacturer_Name=Nichicon, Arrow Part Number=UVR1C471MPD, Arrow Price/Stock=https://www.arrow.com/en/products/uvr1c471mpd/nichicon, Datasheet Link=https://www.nichicon.co.jp/english/series_items/catalog_pdf/e-uvr.pdf, Height=13mm, Manufacturer_Part_Number=UVR1C471MPD
C1 C2 C3 C4 C5 C24 C35: library part 860241480001, "WCAP-AT1H Aluminum Electrolytic Capacitor, Radial, D16 x H35.5mm, 100µF, 450V", Capacitance Tolerance=+/-20%, Case/Size Code="D16 x H35.5mm", Leakage Current=1900µA, Manufacturer="Wurth Elektronik", Max Operating Temperature=105°C, Min Operating Temperature=-25°C, Rated Voltage (DC)=450V, Ripple Current=610mA, Capacitance=100µF, Category="Aluminum Electrolytic Capacitors", ComponentLink1Description="Website Link", ComponentLink1URL=https://www.we-online.com/redexpert/article/860241480001?ad, ComponentLink2Description="Datasheet Link", ComponentLink2URL=https://www.we-online.com/redexpert/spec/860241480001?ad, Diameter=16mm, Dissipation Factor=17%, Endurance=5000h, Height=35.5mm, Manufacturer Part Number=860241480001, Match Code=WCAP-AT1H, Mount="Through Hole", Packaging="Ammo Pack", Technical Reference=ATJK355101M450DSPADE000
C6: library part 860010374014, "WCAP-ATG8 Aluminum Electrolytic Capacitor, Radial, THT, D8 x H16mm, 680uF, 16V", Capacitance Tolerance=+/-20%, Leakage Current=108.8uA, Manufacturer="Wurth Elektronik", Operating Temperature Max=85°C, Operating Temperature Min=-40°C, Rated Voltage (DC)=16V, Ripple Current=640mA, Capacitance=680uF, Category="Aluminum Electrolytic Capacitors", ComponentLink1Description="Website Link", ComponentLink1URL=https://www.we-online.com/redexpert/article/860010374014?ad, ComponentLink2Description="Datasheet Link", ComponentLink2URL=https://www.we-online.com/redexpert/spec/860010374014?ad, Diameter=8mm, Dissipation Factor=16%, Endurance=2000h, Height=16mm, Manufacturer Part Number=860010374014, Match Code=WCAP-ATG8, Mount="Through Hole", Packaging="Ammo Pack", Technical Reference=ATBE160681M016DSPA7B000
C7 C12 C13 C14 C15 C16 C17 C18 C19 C20 C21 C22 C23 C41 C42 C43 C44: library part CAP_0603, "Capacitor SMD 0603"
C8 C11 C27 C28 C29: library part CAP_1206, "Capacitor SMD 1206"
C10: library part CAP_EL_NP_5MM, "Capacitor SMD Electrolytic Non-Polarised 5mm Diameter", Manufacturer=Nichicon
C25 C26: library part 860010273009, "WCAP-ATG8 Aluminum Electrolytic Capacitor, Radial, THT, D6.3 x H11mm, 220uF, 10V", Capacitance Tolerance=+/-20%, Leakage Current=22uA, Manufacturer="Wurth Elektronik", Operating Temperature Max=85°C, Operating Temperature Min=-40°C, Rated Voltage (DC)=10V, Ripple Current=294mA, Capacitance=220uF, Category="Aluminum Electrolytic Capacitors", ComponentLink1Description="Website Link", ComponentLink1URL=https://www.we-online.com/redexpert/article/860010273009?ad, ComponentLink2Description="Datasheet Link", ComponentLink2URL=https://www.we-online.com/redexpert/spec/860010273009?ad, Diameter=6.3mm, Dissipation Factor=19%, Endurance=2000h, Height=11mm, Manufacturer Part Number=860010273009, Match Code=WCAP-ATG8, Mount="Through Hole", Packaging="Ammo Pack", Technical Reference=ATBD110221M010DSPA4B000
C30: library part "WE-FUSEHOLDER BLOCKS 696108003002", "FUSEHOLDER BLOCKS - PCB - CLIP COVER - THT - WR-FSH", Manufacturer="W¨¹rth Elektronik eiSos GmbH", partNo=696108003002, ComponentLink1 Description=Manufacturer, ComponentLink1URL=http://www.we-online.de, ComponentLink2 Description=Datasheet, ComponentLink2URL=http://katalog.we-online.de/em/datasheet/696108003002.pdf, Created by="Karrer Zheng", Created Date=11/11/2014, NoPins=2
C31 C32 C33 C34 C36 C37 C39 C40: library part 860010272005, "WCAP-ATG8 Aluminum Electrolytic Capacitor, Radial, THT, D5 x H11mm, 100uF, 10V", Capacitance Tolerance=+/-20%, Leakage Current=10uA, Manufacturer="Wurth Elektronik", Operating Temperature Max=85°C, Operating Temperature Min=-40°C, Rated Voltage (DC)=10V, Ripple Current=198mA, Capacitance=100uF, Category="Aluminum Electrolytic Capacitors", ComponentLink1Description="Website Link", ComponentLink1URL=https://www.we-online.com/redexpert/article/860010272005?ad, ComponentLink2Description="Datasheet Link", ComponentLink2URL=https://www.we-online.com/redexpert/spec/860010272005?ad, Diameter=5mm, Dissipation Factor=19%, Endurance=2000h, Height=11mm, Manufacturer Part Number=860010272005, Match Code=WCAP-ATG8, Mount="Through Hole", Packaging="Ammo Pack", Technical Reference=ATBC110101M010DSPA3B000
C38: library part 861221484011, "WCAP-AIE8 Aluminum Electrolytic Capacitor, Snap-In, D25 x H40mm, 220µF, 450V", Capacitance Tolerance=+/-20%, Leakage Current=943.93µA, Manufacturer="Wurth Elektronik", Operating Temperature Max=85°C, Operating Temperature Min=-25°C, Rated Voltage (DC)=450V, Ripple Current=1590mA, Capacitance=220µF, Category="Aluminum Electrolytic Capacitors", ComponentLink1Description="Website Link", ComponentLink1URL=https://www.we-online.com/redexpert/article/861221484011?ad, ComponentLink2Description="Datasheet Link", ComponentLink2URL=https://www.we-online.com/redexpert/spec/861221484011?ad, Diameter=25mm, Dissipation Factor=20%, Endurance=3000h, Height=40mm, Manufacturer Part Number=861221484011, Match Code=WCAP-AIE8, Mount="Through Hole", Packaging=Tray, Technical Reference=ANAO400221M450DSIC3C000
D1: "Diode", Manufacturer_Name=STMicroelectronics, Mouser Part Number=511-STTH60RQ06WY, Datasheet Link=https://www.st.com/resource/en/datasheet/stth60rq06-y.pdf, Height=5.15mm, Manufacturer_Part_Number=STTH60RQ06WY, Mouser Price/Stock=https://www.mouser.co.uk/ProductDetail/STMicroelectronics/STTH60RQ06WY?qs=MLItCLRbWsyVCwranNoGkg%3D%3D
D2: "1A, 40V, Schottky Rectifier", Package="SMA-2 Taiwan Semiconductor", Check_prices=https://www.snapeda.com/parts/SS14/taiwan/view-part/?ref=eda, MF="Taiwan Semiconductor", MP=SS14, SnapEDA_Link=https://www.snapeda.com/parts/SS14/taiwan/view-part/?ref=snap
D3: "Diode", Manufacturer_Name=Rectron, Mouser Part Number=583-BA159, Datasheet Link=http://pdf1.alldatasheet.com/datasheet-pdf/view/14648/PANJIT/BA159.html, Manufacturer_Part_Number=BA159, Mouser Price/Stock=https://www.mouser.co.uk/ProductDetail/Rectron/BA159?qs=7pEAo90IqNFl%2FmbY1pJmIw%3D%3D
D4 D6: library part 824521500, "WE-TVSP SMT Power TVS Diode, DO-214AA, Bidirectional, 600W, 5VDC", (Reverse) Breakdown Voltage=6.7V, (Reverse) Peak Pulse Current=65.3A, Case/Size Code=DO-214AA, Clamping Voltage=9.2V, Manufacturer="Wurth Elektronik", Operating Temperature Max=150°C, Operating Temperature Min=-65°C, Operating Voltage (DC)=5V, Power Dissipation=600W, Category="Surge Protection", ComponentLink1Description="Website Link", ComponentLink1URL=https://www.we-online.com/redexpert/article/824521500?ad, ComponentLink2Description="Datasheet Link", ComponentLink2URL=https://www.we-online.com/redexpert/spec/824521500?ad, Height=2.4mm, Length=4.32mm, Manufacturer Part Number=824521500, Match Code=WE-TVSP, Mount="Surface Mount", Packaging="Tape and Reel", Polarity=Bidirectional, Width=3.62mm
D5: "Diode", Manufacturer_Name="ROHM Semiconductor", Mouser Part Number=N/A, Datasheet Link=http://rohmfs.rohm.com/en/products/databook/datasheet-nrnd/discrete/diode/fast_recovery/rf071m2s.pdf, Height=0.9mm, Manufacturer_Part_Number=RF071M2S, Mouser Price/Stock=https://www.mouser.co.uk/ProductDetail/ROHM-Semiconductor/RF071M2S?qs=OfeFRKQgECgpuFmwKn2lvw%3D%3D
D7: "Diode", Manufacturer_Name="Comchip Technology", Mouser Part Number=750-AES2HF-HF, Datasheet Link=https://www.comchiptech.com/product.php?id=12661, Height=1.1mm, Manufacturer_Part_Number=AES2HF-HF, Mouser Price/Stock=https://www.mouser.co.uk/ProductDetail/Comchip-Technology/AES2HF-HF?qs=GBLSl2Akirufo1pW%252B4BBNA%3D%3D
DS1: "Non-Touch Graphic LCD Display Module - White OLED SPI 1.54 (39.12mm) 128 x 64", Package=None, Check_prices=https://www.snapeda.com/parts/AOM12864A0-1.54WW-ANO/Orient+Display/view-part/?ref=eda, MF="Orient Display", MP=AOM12864A0-1.54WW-ANO, SnapEDA_Link=https://www.snapeda.com/parts/AOM12864A0-1.54WW-ANO/Orient+Display/view-part/?ref=snap
IC1: "Integrated Circuit", Manufacturer_Name=Advanced, Datasheet Link=https://datasheet.datasheetarchive.com/originals/distributors/Datasheets-28/DSA-550594.pdf, Height=1.8mm, Manufacturer_Part_Number=AMS1117-3.3
IC2: "Integrated Circuit", Arrow Part Number=TJA1050T/CM,118, Manufacturer_Name=NXP, Mouser Part Number=771-TJA1050T/CM118, Arrow Price/Stock=https://www.arrow.com/en/products/tja1050tcm118/nxp-semiconductors?utm_currency=USD&region=europe, Datasheet Link=http://www.nxp.com/docs/en/data-sheet/TJA1050.pdf, Height=1.75mm, Manufacturer_Part_Number=TJA1050T/CM,118, Mouser Price/Stock=https://www.mouser.co.uk/ProductDetail/NXP-Semiconductors/TJA1050T-CM118?qs=5XOdhvmYM0NFFspw0VP5sA%3D%3D
IC3 IC4: "Integrated Circuit", Manufacturer_Name="Allegro Microsystems", Datasheet Link=https://www.allegromicro.com/en/products/sense/current-sensor-ics/zero-to-fifty-amp-integrated-conductor-sensor-ics/acs37002, Height=2.65mm, Manufacturer_Part_Number=ACS37002KMABTR-050B5-00
IC5: "Integrated Circuit", Manufacturer_Name=Shikues, Datasheet Link=https://datasheet.lcsc.com/szlcsc/SK-AMS1117-5-0_C165483.pdf, Height=1.8mm, Manufacturer_Part_Number=AMS1117-5.0
J2 J5: library part S2B-XH-A(LF)(SN), "Connector Header Through Hole, Right Angle 2 position 0.098 (2.50mm)", Package=None, Check_prices=https://www.snapeda.com/parts/S2B-XH-A(LF)(SN)/JST/view-part/?ref=eda, MF="JST Sales", MP=S2B-XH-A(LF)(SN), SnapEDA_Link=https://www.snapeda.com/parts/S2B-XH-A(LF)(SN)/JST/view-part/?ref=snap
J3: "OBD II 16pin 90 Degree Angle Male Plug Connector", Package=None, Check_prices=https://www.snapeda.com/parts/C-OBD-II-16M/Comtech+Electronic+Co.%252C+LTD/view-part/?ref=eda, MF="Comtech Electronic Co., LTD", MP=C-OBD-II-16M, SnapEDA_Link=https://www.snapeda.com/parts/C-OBD-II-16M/Comtech+Electronic+Co.%252C+LTD/view-part/?ref=snap
J4: "USB Type C Connector Horizontal SMT", Manufacturer="Koren Hroparts", Manufacturer Part Number=TYPE-C-31-M-12
J6 J7: library part XT60PW-F, "XT60 horizontal female 2-pin AMASS", Manufacturer=AMASS, Distributor Link=https://www.tme.eu/de/details/xt60pw-f/dc-steckverbinder/amass/, Manufacturer Part Number=XT60PW-F
J8: "16 Position FFC, FPC Connector Contacts, Top and Bottom 0.020 (0.50mm) Surface Mount, Right Angle", Package=None, Check_prices=https://www.snapeda.com/parts/FFC2B28-16-G/Global+Connector+Technology/view-part/?ref=eda, MF="Global Connector Technology", MP=FFC2B28-16-G, SnapEDA_Link=https://www.snapeda.com/parts/FFC2B28-16-G/Global+Connector+Technology/view-part/?ref=snap
J9: "Connector Header Through Hole, Right Angle 2 position 0.098 (2.50mm)", Package=None, Check_prices=https://www.snapeda.com/parts/S2B-XH-A(LF)(SN)/JST/view-part/?ref=eda, MF="JST Sales", MP=S2B-XH-A(LF)(SN), SnapEDA_Link=https://www.snapeda.com/parts/S2B-XH-A(LF)(SN)/JST/view-part/?ref=snap
K1: "19 x 15.5 x 15.8 mm, 12 V, 10 A, SPDT (1 Form C), Power Relay", Package=None, Check_prices=https://www.snapeda.com/parts/PR13-12V-450-1C/Same+Sky/view-part/?ref=eda, MF="Same Sky", MP=PR13-12V-450-1C, SnapEDA_Link=https://www.snapeda.com/parts/PR13-12V-450-1C/Same+Sky/view-part/?ref=snap
L1: library part 7443762504010, "WE-HCFT THT High Current Inductor, size 2504, 1µH, 39A", Case/Size Code=2504, DC Resistance=0.86mΩ, DC Resistance Max=0.95mΩ, Inductance Tolerance=20%, Manufacturer="Wurth Elektronik", Max Operating Temperature=125°C, Min Operating Temperature=-40°C, Rated Current=39A, Saturation Current=33A, Self Resonant Frequency=38MHz, Category="Power Inductors", ComponentLink1Description="Website Link", ComponentLink1URL=https://www.we-online.com/redexpert/article/7443762504010?ad, ComponentLink2Description="Datasheet Link", ComponentLink2URL=https://www.we-online.com/redexpert/spec/7443762504010?ad, Height=4.1mm, Inductance=1µH, Length=22mm, Manufacturer Part Number=7443762504010, Match Code=WE-HCFT, Mount="Through Hole", Packaging=Tray, Width=25.7mm
L2: library part 74437368010, "WE-LHMI SMT Power Inductor, size 1040, 1 μH, 21.3 A, 3.3 mΩ", Case/Size Code=1040, DC Resistance Max="3.3 mΩ", Manufacturer="Wurth Elektronik", Max Operating Temperature="125 °C", Min Operating Temperature="-40 °C", Performance Rated Current="21.3 A", Saturation Current @ 10%="22.7 A", Saturation Current @ 30%="48.3 A", Self Resonant Frequency="45 MHz", Category="Power Inductors", ComponentLink1Description="Website Link", ComponentLink1URL=https://www.we-online.com/redexpert/article/74437368010?ad, ComponentLink2Description="Datasheet Link", ComponentLink2URL=https://www.we-online.com/redexpert/spec/74437368010?ad, Height="3.8 mm", Inductance="1 μH", Length="11 mm", Manufacturer Part Number=74437368010, Match Code=WE-LHMI, Mount="Surface Mount", Packaging="Tape and Reel", Width="10 mm"
L3: "Inductor", Manufacturer_Name="Texas Instruments", Mouser Part Number=595-UCC28740DR, Arrow Part Number=UCC28740DR, Arrow Price/Stock=https://www.arrow.com/en/products/ucc28740dr/texas-instruments?region=nac, Datasheet Link=http://www.ti.com/lit/gpn/ucc28740, Manufacturer_Part_Number=UCC28740DR, Mouser Price/Stock=https://www.mouser.co.uk/ProductDetail/Texas-Instruments/UCC28740DR?qs=e1ok2LiJcmZNvNsbUBmieA%3D%3D
Q1 Q2: "Transistor", Manufacturer_Name="ROHM Semiconductor", Mouser Part Number=755-SCT3030ALGC11, Datasheet Link=https://datasheet.datasheetarchive.com/originals/distributors/DKDS-18/357094.pdf, Height=5.15mm, Manufacturer_Part_Number=SCT3030ALGC11, Mouser Price/Stock=https://www.mouser.co.uk/ProductDetail/ROHM-Semiconductor/SCT3030ALGC11?qs=tlR8i4ZVbUfmf0QVOgVHPA%3D%3D
Q3: "MOSFET (N-Channel)", Manufacturer_Name=STMicroelectronics, Mouser Part Number=511-STD13NM60ND, Arrow Part Number=STD13NM60ND, Arrow Price/Stock=https://www.arrow.com/en/products/std13nm60nd/stmicroelectronics?region=nac, Datasheet Link=https://mm.digikey.com/Volume0/opasdata/d220001/medias/docus/516/STx13NM60ND_DS.pdf, Height=2.63mm, Manufacturer_Part_Number=STD13NM60ND, Mouser Price/Stock=https://www.mouser.co.uk/ProductDetail/STMicroelectronics/STD13NM60ND?qs=DqCdCwOw4%2F6kZ%252B3qCIf%2FhQ%3D%3D
R1 R3 R4 R5 R6 R14 R15 R16 R17 R18 R19 R20 R21 R22 R23 R24 R25 R26 R27 R?: library part RES_0603, "Resistor SMD 0603"
R7 R8 R9 R10 R11 R12 R13 R28 R29: library part RES_0402, "Resistor SMD 0402"
RV1: library part 820443211E, "WE-VD Disk Varistor, D16.5 x H20.5 mm, 320 VAC, 418 VDC", (Reverse) Breakdown Voltage="510 V", (Reverse) Peak Pulse Current="6000 A", Channel Input Capacitance="370 pF", Clamping Voltage="842 V", Manufacturer="Wurth Elektronik", Max Operating Temperature="105 °C", Min Operating Temperature="-40 °C", Operating Voltage (AC)="320 V", Operating Voltage (DC)="418 V", Power Dissipation="0.6 W", Category="Surge Protection", ComponentLink1Description="Website Link", ComponentLink1URL=https://www.we-online.com/redexpert/article/820443211E?ad, ComponentLink2Description="Datasheet Link", ComponentLink2URL=https://www.we-online.com/redexpert/spec/820443211E?ad, Diameter="16.5 mm", Energy Absorption="190 J", Height="20.5 mm", Manufacturer Part Number=820443211E, Match Code=WE-VD, Mount="Through Hole", Packaging="Tape and Reel", Width="7.2 mm"
SW1: "Slide Switch SPDT Surface Mount", Package=None, Check_prices=https://www.snapeda.com/parts/CL-SB-12B-01T/Nidec/view-part/?ref=eda, MF="Nidec Copal", MP=CL-SB-12B-01T, SnapEDA_Link=https://www.snapeda.com/parts/CL-SB-12B-01T/Nidec/view-part/?ref=snap
SW2: library part PTS815-SJM-250-SMTR-LFS, "Tactile Switches Tact Switch, 12 VDC, 50 mA, 4.2x3.2, 2.5mm H, 180gf, J leadspp SPST", Manufacturer="C&K Switches", Manufacturer Part Number="PTS815 SJM 250 SMTR LFS"
T1: library part 750311771, "WE-FB Flyback Transformer suitable for LT3748, SMT, EFD25, 100-400Vin, Uo1 = 15V/3A, 45W", Auxiliary Voltage=15V, Case/Size Code=EFD25, Inductance=500uH, Input Voltage=100-400VDC, Insulation Test Voltage=2000VAC, Leakage Inductance=10uH, Manufacturer="Wurth Elektronik", Operating Temperature Max=125°C, Operating Temperature Min=-40°C, Output Current 1=3A, Output Power=45W, Saturation Current=2.5A, Category="Transformers For DC-DC Converter", ComponentLink1Description="Website Link", ComponentLink1URL=https://www.we-online.com/redexpert/article/750311771?ad, ComponentLink2Description="Datasheet Link", ComponentLink2URL=https://www.we-online.com/redexpert/spec/750311771?ad, Height=13.69mm, IC Reference=LT3748, Length=32.31mm, Manufacturer Part Number=750311771, Match Code=WE-FB, Mount="Surface Mount", Output Voltage 1=15V, Packaging="Tape and Reel", Turns Ratio=3:3:1:1, Width=27.03mm
U1: "ARMÂ® CortexÂ®-M4F STM32G4 Microcontroller IC 32-Bit Single-Core 170MHz 512KB (512K x 8) FLASH 64-LQFP (10x10)", Package="LQFP-64 STMicroelectronics", Check_prices=https://www.snapeda.com/parts/STM32G474RET6/STMicroelectronics/view-part/?ref=eda, MF=STMicroelectronics, MP=STM32G474RET6, SnapEDA_Link=https://www.snapeda.com/parts/STM32G474RET6/STMicroelectronics/view-part/?ref=snap
U2: "Optoisolator Transistor Output - 1 Channel 4-DIP", Package="DIP-4 Sharp Microelectronics", Availability="In Stock", Check_prices=https://www.snapeda.com/parts/PC817X3NSZ1B/Sharp+Microelectronics/view-part/?ref=eda, MF="Sharp Microelectronics", MP=PC817X3NSZ1B, Price=None, Purchase-URL=https://pricing.snapeda.com/search/part/PC817X3NSZ1B/?ref=eda, SnapEDA_Link=https://www.snapeda.com/parts/PC817X3NSZ1B/Sharp+Microelectronics/view-part/?ref=snap
VR1: Package=None, Availability=Unavailable, MP=TL431ILP, Price=None
Y1: library part 830003260, "WE-XTAL Quartz Crystal, SMT, HC49/4HSMX, 3.6864 MHz, ±30ppm", Case/Size Code=HC49/4HSMX, Frequency="3.6864 MHz", Frequency Stability=50ppm, Frequency Tolerance=±30ppm, Load Capacitance=16pF, Manufacturer="Wurth Elektronik", Max Operating Temperature=60°C, Min Operating Temperature=-10°C, Application="Processor, UART", Category=Crystals, ComponentLink1Description="Website Link", ComponentLink1URL=https://www.we-online.com/redexpert/article/830003260?ad, ComponentLink2Description="Datasheet Link", ComponentLink2URL=https://www.we-online.com/redexpert/spec/830003260?ad, Height=4.5mm, Length=12.4mm, Manufacturer Part Number=830003260, Match Code=WE-XTAL, Mount="Surface Mount", Packaging="Tape and Reel", Width=4.7mm

## Nets (pads, with @x,y where several pads share a name; then routed paths per layer and width w, separated by ;. In a path a pad name is that pad's centre, name@x,y a point inside that pad or via, vN(x,y) a via of type N, cw(c..) or ccw(c..) an arc to the next point about the centre after c; other vN are vias at no path point)
3.3V: C10.1 C11.1 C12.1 C13.1 C14.1 C15.1 C16.1 C17.1 C18.1 C19.1 DS1.2 IC1.2 R7.2 R11.2 R28.1 R29.2 SW1.3 U1.1 U1.16 U1.28 U1.29 U1.32 U1.48 U1.64 | length 52
  Bottom Layer w0.2: 123.162,75.918 U1.28 U1.29 ; U1.32 125.162,76.013 125.222,76.073 ; U1.48 127.578,65.465 U1.48@127.618,65.425
  Bottom Layer w0.3: R11.2 110.831,75.819 113.685,72.965 U1.16@115.167,72.965 ; C16.1 113.565,63.515 113.565,64.162 114.868,65.465 U1.1 ; C17.1 113.653,74.479 U1.16@115.167,72.965 ; U1.16 U1.16@115.167,72.965 ; C14.1 116.178,61.456 117.652,62.93 117.652,63.535 U1.64 ; 123.162,75.918 123.79,76.546 C12.1@123.79,77.574 ; 125.222,76.073 125.742,76.593 C18.1
  Bottom Layer w0.5: C12.1@123.79,77.574 C12.1 C15.1 C13.1 C18.1 ; R7.2@124.96,60.883 R7.2 126.085,60.833 128.992,57.926 SW1.3 136.846,57.826 137.679,58.659 138.079,58.659 C11.1@138.329,58.909 ; C11.1 C11.1@138.329,58.909 ; C10.1 139.01,53.34 138.329,54.021 C11.1@138.329,58.909
5V: C33.1 C39.1 C41.2 C42.2 IC2.3 IC3.10 IC4.10 IC5.2 | length 7.3
  Top Layer w0.254: IC3.10 IC3.10@60.239,102.489
  Bottom Layer w0.5: IC5.2 126.111,36.861 127.508,35.464 C41.2 127.514,34.03 127.514,31.375 C42.2
12V: 470uF.1 C26.1 C43.1 C44.1 IC5.3 J5.2 K1.NO L2.2 R14.2 | length 99.3
  Bottom Layer w0.5: L2.2 93.188,26.035 95.885,23.338 R14.2 95.985,9.755 96.135,9.905 96.135,9.922 96.428,10.215 112.467,10.215 K1.NO 125.024,2.89 C26.1 ; IC5.3 123.211,34.992 124.067,34.136 C44.1 C43.1 124.067,22.293 470uF.1 130.485,15.875 149.892,15.875 J5.2
400VDC_BAT+: C24.1 C30.2 D4.1 D6.1 IC3.1 IC3.2 IC3.3 IC3.4 L3.7 RV1.1 T1.4 | length 35.2
  Top Layer w4: C24.1 11.835,22.642 29.627,22.642 37.617,30.632 T1.4
ADC1_STM32: C31.1 IC3.13 R24.1 U1.12
ADC2_STM32: C36.1 IC4.13 R26.1 U1.13
ADC3_STM32: J8.8 U1.14
"Buck-boost command": Q1.1 U1.49
current_sensor_2: IC4.1 IC4.2 IC4.3 IC4.4 Q2.3
EN_LEFT: J8.6 U1.53 | length 39.9
  Bottom Layer w0.2: U1.53 123.162,64.14 123.322,64.3 123.322,64.363 123.739,64.78 126.826,64.78 127.597,64.009 134.019,64.009 148.095,78.085 J8.6
EN_RIGHT: J8.5 U1.54 | length 40.6
  Bottom Layer w0.2: U1.54 122.662,64.14 122.822,64.3 122.822,64.363 123.539,65.08 126.95,65.08 127.721,64.309 133.895,64.309 148.171,78.585 J8.5
GND: 470uF.2 C1.2 C2.2 C3.2 C6.2 C7.2 C8.2 C10.2 C11.2 C12.2 C13.2 C14.2 C15.2 C16.2 C17.2 C18.2 C19.2 C20.2 C21.2 C22.2 C23.2 C25.2 C26.2 C31.2 C32.2 C33.2 C34.2 C36.2 C37.2 C39.2 C40.2 C41.1 C42.1 C43.2 C44.2 D2.A DS1.1 IC1.1 IC2.2 IC2.8 IC3.14 IC3.15 IC3.16 IC4.14 IC4.15 IC4.16 IC5.1 J2.2 J3.4 J3.5 J4.A1B12 J4.B1A12 J4.SH J5.1 J8.16 J9.2 K1.A2 R1.1 R3.1 R4.1 R10.2 R12.2 R13.2 R23.1 R25.2 R27.2 SW1.1 SW2.2 T1.7 T1.8 T1.9 U1.15 U1.27 U1.31 U1.47 U1.63 VR1.2 | length 1.3
  Top Layer w0.254: IC3.15 IC3.15@60.239,108.839 ; IC3.16 IC3.16@60.239,110.109
GND_HV: C4.2 C5.2 C24.2 C29.1 C35.2 C38.2 D1.2 D4.2 D6.2 J6.2 J7.2 L3.4 R19.1 R20.1 R21.1 RV1.2 T1.6
IP-1: C1.1 C2.1 C3.1 IC3.5 IC3.6 IC3.7 IC3.8 Q1.2 | length 49.2
  Top Layer w2.54: C2.1@28.067,50.232 C2.1
  Top Layer w6: C3.1 C2.1@28.067,50.232 ; C2.1 C1.1 50.582,50.486 54.194,46.874 Q1.2
NetC4_1: C4.1 C5.1 L1.2 Q2.2
NetC6_1: C6.1 C7.1 C8.1 IC1.3 J2.1 | length 31.9
  Bottom Layer w0.5: IC1.3 139.069,36.443 138.783,36.729 C6.1 148.789,43.688 J2.1 150.039,49.82 147.166,52.693 C7.1 146.966,52.693 145.912,53.747 C8.1
NetC20_1: C20.1 U1.5 Y1.1 | length 13.6
  Bottom Layer w0.3: C20.1 109.132,63.004 Y1.1@109.982,62.154 ; Y1.1 Y1.1@109.982,62.154 ; U1.5 114.47,67.465 111.53,64.525 110.832,64.525 109.982,63.675 Y1.1@109.982,62.154
NetC21_1: C21.1 R8.2 U1.61 | length 5.7
  Bottom Layer w0.2: U1.61 119.162,62.258 120.003,61.417 C21.1 119.778,60.1 119.778,58.318 R8.2
NetC22_1: C22.1 U1.6 Y1.2 | length 11.8
  Bottom Layer w0.3: C22.1 109.132,70.473 109.982,71.323 Y1.2 111.432,71.425 114.882,67.975 115.732,67.975 U1.6
NetC23_1: C23.1 J4.A4B9 J4.B4A9 R9.1
NetC25_1: C25.1 D3.1 L2.1 R15.2 | length 21.8
  Bottom Layer w0.5: R15.2 80.518,13.589 D3.1 ; L2.1 83.388,17.069 D3.1 ; C25.1 84.328,16.129 D3.1
NetC27_1: C27.1 R14.1 R23.2 VR1.3 | length 12.6
  Bottom Layer w0.5: VR1.3 94.654,3.683 95.885,4.914 R14.1 95.785,8.255 94.769,9.271 C27.1
NetC27_2: C27.2 U2.2 VR1.1 | length 15.5
  Bottom Layer w0.5: U2.2 81.153,9.271 C27.2 88.747,4.652 89.027,4.372 VR1.1
NetC28_1: C28.1 R22.1 U2.3 | length 16.9
  Top Layer w0.5: C28.1 70.078,15.475 70.866,14.687 R22.1 70.866,11.457 79.003,3.32 79.484,3.32 U2.3
NetC28_2: C28.2 L3.3 R19.2 R22.2 | length 4.7
  Top Layer w0.5: R22.2 72.366,11.657 73.178,12.469 C28.2
NetC29_2: C29.2 L3.1 R16.1 U2.4 | length 10.8
  Top Layer w0.5: C29.2 76.02,4.038 76.883,3.175 U2.4
NetC30_1: C30.1 J6.1
NetC32_1: C32.1 IC3.12 | length 0.7
  Top Layer w0.254: IC3.12 IC3.12@60.239,105.029
NetC34_1: C34.1 IC3.11 R24.2 R25.1
NetC35_1: C35.1 C38.1 D7.1 J7.1
NetC37_1: C37.1 IC4.12
NetC40_1: C40.1 IC4.11 R26.2 R27.1
NetD1_1: D1.1 L1.1 Q1.3
NetD3_2: D3.2 T1.10 T1.11 T1.12
NetD5_1: D5.1 R16.2 | length 12.3
  Top Layer w0.5: D5.1 60.072,2.969 63.956,6.853 64.098,6.853 67.806,10.561 R16.2
NetD5_2: D5.2 R17.2 T1.5 | length 3.3
  Top Layer w0.5: D5.2 57.022,5.475 57.416,5.869 R17.2
NetD7_2: D7.2 IC4.5 IC4.6 IC4.7 IC4.8
NetIC2_6: IC2.6 R6.2 | length 6.4
  Bottom Layer w0.2: R6.2 133.323,92.976 135.249,91.051 137.187,91.051 137.304,90.933 137.304,90.208 137.424,90.088 IC2.6
NetIC2_7: IC2.7 R5.2
NetJ3_6: J3.6 R4.2 R5.1 | length 10.6
  Bottom Layer w0.2: R4.2 R5.1 145.404,95.481 145.404,98.88 J3.6
NetJ3_14: J3.14 R3.2 R6.1 | length 11.9
  Bottom Layer w0.2: R6.1 R3.2 139.151,94.476 142.005,97.33 J3.14
NetJ4_A5: J4.A5 R13.1
NetJ4_B5: J4.B5 R12.1
NetK1_COM: K1.COM Q2.1 R1.2 | length 6.3
  Top Layer w0.5: R1.2 102.858,3.783 105.592,6.517 K1.COM
NetL3_2: L3.2 R17.1 R20.2 | length 8.8
  Top Layer w0.5: L3.2 58.801,9.867 58.559,9.625 R20.2 58.559,9.425 58.916,9.068 R17.1
NetL3_5: L3.5 R18.1 | length 3.5
  Top Layer w0.5: L3.5 63.2,19.878 64.289,20.967 R18.1
NetL3_6: L3.6 Q3.1 R?.1 | length 11.8
  Top Layer w0.5: Q3.1 59.309,21.115 60.071,20.353 L3.6 60.071,19.403 60.932,18.542 63.846,18.542 63.95,18.646 64.239,18.646 R?.1
NetQ3_2: Q3.2 T1.1 | length 13.3
  Top Layer w4: T1.1 51.485,33.859 52.991,32.353 Q3.2
NetQ3_3: Q3.3 R18.2 R21.2 R?.2 | length 6.9
  Top Layer w0.5: Q3.3 63.881,25.453 64.389,24.945 R18.2 ; R?.2 64.489,17.296 65.024,16.761 R21.2
NetR8_1: R8.1 SW1.C | length 9.8
  Bottom Layer w0.2: R8.1 118.753,58.243 123.57,53.426 SW1.C
NetR11_1: R11.1 SW2.1 U1.7 | length 8.1
  Bottom Layer w0.2: R11.1 108.72,77.406 108.979,77.665 109.129,77.665 113.629,77.665 113.744,77.665 113.994,77.415 113.994,76.475 ; U1.7 U1.7@115.782,68.505
NetR15_1: R15.1 U2.1 | length 2.8
  Bottom Layer w0.5: U2.1 77.095,10.801 77.095,13.583 R15.1
NetT1_2: T1.2 T1.3
OCF1_N: IC3.9 R7.1 U1.51
OCF2_N: IC4.9 R28.2 U1.36 | length 2.5
  Bottom Layer w0.3: U1.36 128.938,71.465 129.363,71.89 R28.2
OLED_CS: DS1.7 U1.17 | length 57.1
  Bottom Layer w0.2: DS1.7 87.249,107.307 117.662,76.894 U1.17
OLED_DC: DS1.6 U1.18 | length 56.2
  Bottom Layer w0.2: DS1.6 89.789,105.192 118.162,76.819 U1.18
OLED_MOSI: DS1.4 U1.20 | length 54.5
  Bottom Layer w0.2: DS1.4 94.869,100.96 119.162,76.667 U1.20
OLED_RST: DS1.5 U1.19 | length 55.4
  Bottom Layer w0.2: DS1.5 92.329,103.076 118.662,76.743 U1.19
OLED_SCK: DS1.3 U1.21 | length 53.7
  Bottom Layer w0.2: DS1.3 97.409,98.933 119.662,76.68 U1.21
PWM_H_LEFT: J8.1 U1.38 | length 33.2
  Bottom Layer w0.2: U1.38 136.655,70.465 146.775,80.585 J8.1
PWM_H_RIGHT: J8.4 U1.41 | length 33.2
  Bottom Layer w0.2: U1.41 136.7,68.965 146.82,79.085 J8.4
PWM_L_LEFT: J8.3 U1.40 | length 33.2
  Bottom Layer w0.2: U1.40 136.7,69.465 146.82,79.585 J8.3
PWM_L_RIGHT: J8.7 U1.52 | length 39.2
  Bottom Layer w0.2: U1.52 123.702,63.585 123.702,64.18 123.822,64.3 123.822,64.363 123.939,64.48 126.701,64.48 127.472,63.709 134.143,63.709 148.019,77.585 J8.7
Relay_command: D2.C K1.A1 U1.50 | length 7.9
  Top Layer w0.5: D2.C 101.6,10.934 102.1,11.434 102.112,11.434 105.568,14.89 K1.A1
RX1: IC2.4 U1.34 | length 16.7
  Bottom Layer w0.2: U1.34 127.122,72.505 127.877,72.505 127.889,72.517 127.9,72.517 128.017,72.634 128.017,75.464 136.779,84.226 IC2.4
SPEED_IN: J8.2 U1.39 | length 33.2
  Bottom Layer w0.2: U1.39 136.7,69.965 146.82,80.085 J8.2
TEMP_AIN: J9.1 R29.1 U1.42 | length 6.9
  Bottom Layer w0.2: R29.1 146.384,84.844 J9.1
TX1: IC2.1 U1.35 | length 19.2
  Bottom Layer w0.2: U1.35 127.087,71.97 127.977,71.97 128.317,72.31 128.317,72.683 134.249,78.615 134.876,78.615 140.262,84.001 140.364,84.001 140.589,84.226 IC2.1
USB_N: J4.A7 J4.B7 U1.45
USB_P: J4.A6 J4.B6 U1.46
VBUS_SENSE: R9.2 R10.1 U1.43
pads on no net: DS1.P1 DS1.P2 DS1.P3 DS1.P4 IC1.4 IC2.5 IC5.4 J3.1 J3.2 J3.3 J3.7 J3.8 J3.9 J3.10 J3.11 J3.12 J3.13 J3.15 J3.16 J4.A8 J4.B8 J4.MH J6.MH J7.MH J8.9 J8.10 J8.11 J8.12 J8.13 J8.14 J8.15 J8.S1 J8.S2 K1.NC SW1. U1.2 U1.3 U1.4 U1.8 U1.9 U1.10 U1.11 U1.22 U1.23 U1.24 U1.25 U1.26 U1.30 U1.33 U1.37 U1.44 U1.55 U1.56 U1.57 U1.58 U1.59 U1.60 U1.62

## Polygon pours and split planes (outlines as drawn)
NetC35_1 on Top Layer "NETC35_1_L01_P001" (solid, pour order 1): 8.382,72.771 72.517,72.771 72.517,62.865 8.636,62.865 8.382,63.119
NetC30_1 on Top Layer "NETC30_1_L01_P000" (solid, pour order 0): 11.43,113.03 27.94,113.03 27.94,92.696 27.926,92.71 11.43,92.71
no net on HV_GND (split plane): 159.383,0.637 0.637,0.637 0.637,122.045 159.383,122.045
no net on LV_GND (split plane): 159.383,0.637 0.637,0.637 0.637,122.045 159.383,122.045

## Silkscreen, mask and mechanical layers (free items; w line width, h text height)
Top Overlay:
  text "INPUT" at 5.834,101.973 h2
  text "OUTPUT" at 5.453,82.669 h2
Bottom Overlay:
  text "TO ECU" at 129.04,93.083 h2
  text "BTS" at 151.392,80.637 h2
  text "TO INV" at 154.186,73.906 h2
  text "USB" at 157.869,55.364 h2
  text "BAT OUT" at 158.25,36.822 h2
  text "BAT IN" at 158.25,10.279 h2
Mechanical 1:
  the board outline again, w0.254

## Text inside footprints (layer, text, board x,y; h text height)
C1: Top Overlay "+" at 47.359,55.286 h1.5 r90
C2: Top Overlay "+" at 29.071,55.286 h1.5 r90
C3: Top Overlay "+" at 11.291,55.032 h1.5 r90
C4: Top Overlay "+" at 119.929,27.952 h1.5
C5: Top Overlay "+" at 109.359,38.948 h1.5 r270
C6: Bottom Overlay "+" at 141.583,44.438 h1.5 r180
C24: Top Overlay "+" at 9.029,19.898 h1.5 r270
C25: Bottom Overlay "+" at 86.978,15.629 h1
C26: Bottom Overlay "+" at 129.151,4.067 h1 r90
C31: Top Overlay "+" at 68.572,107.444 h1 r90
C32: Top Overlay "+" at 64.135,108.204 h1 r270
C33: Top Overlay "+" at 58.799,97.401 h1 r180
C34: Top Overlay "+" at 72.265,96.528 h1
C35: Top Overlay "+" at 59.829,62.443 h1.5 r270
C36: Top Overlay "+" at 90.178,72.388 h1 r270
C37: Top Overlay "+" at 93.988,66.8 h1 r270
C38: Top Overlay "+" at 37.608,61.45 h2 r270
C39: Top Overlay "+" at 79.881,62.73 h1 r180
C40: Top Overlay "+" at 97.782,66.28 h1 r90
J2: Mechanical 13 "PCB Edge" at 158.914,54.356 h0.81 r90
J5: Mechanical 13 "PCB Edge" at 159.168,27.686 h0.81 r90
J6: Top Overlay "+" at 24.478,108.395 h4 r90; Top Overlay "-" at 24.478,115.761 h4 r90; Mechanical 13 "-" at 13.414,116.697 h1 r90; Mechanical 13 "+" at 13.414,109.497 h1 r90
J7: Top Overlay "+" at 24.732,67.882 h4 r90; Top Overlay "-" at 24.605,75.756 h4 r90; Mechanical 13 "-" at 13.541,76.527 h1 r90; Mechanical 13 "+" at 13.541,69.327 h1 r90
J9: Mechanical 13 "PCB Edge" at 159.041,97.79 h0.81 r90